# Altium PCB ECU_Freio_2024_Equipe_Imperador.PcbDoc
Units mm, origin at the board's own origin, x right, y up, seen from the top; angles counter-clockwise.
Board outline 61.21 x 68.83 mm, 2 copper layers (Top Layer, Bottom Layer); 18 components, 19 nets, 108 pads, 13 vias.
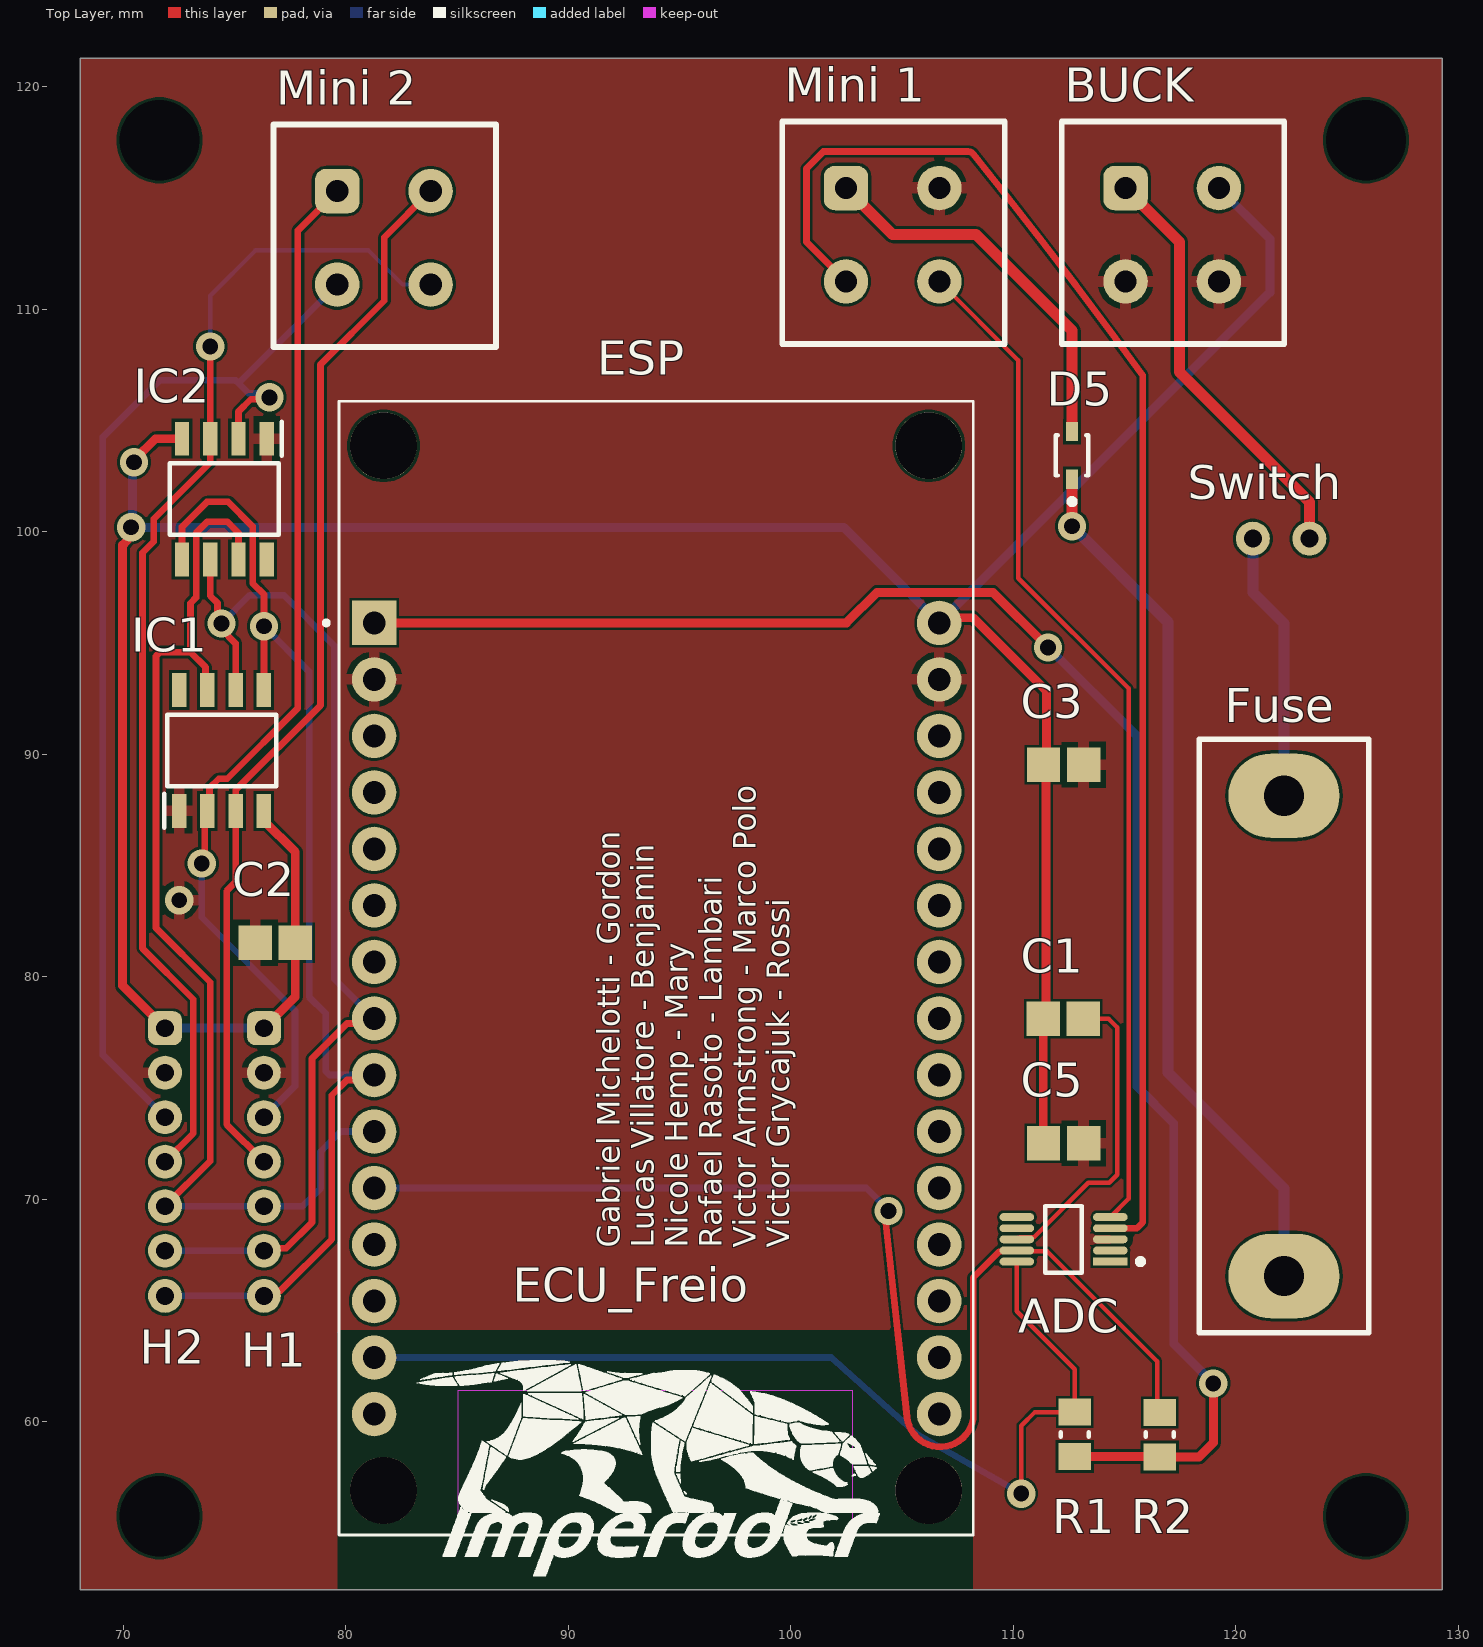
[diagram p0: Top Layer view]
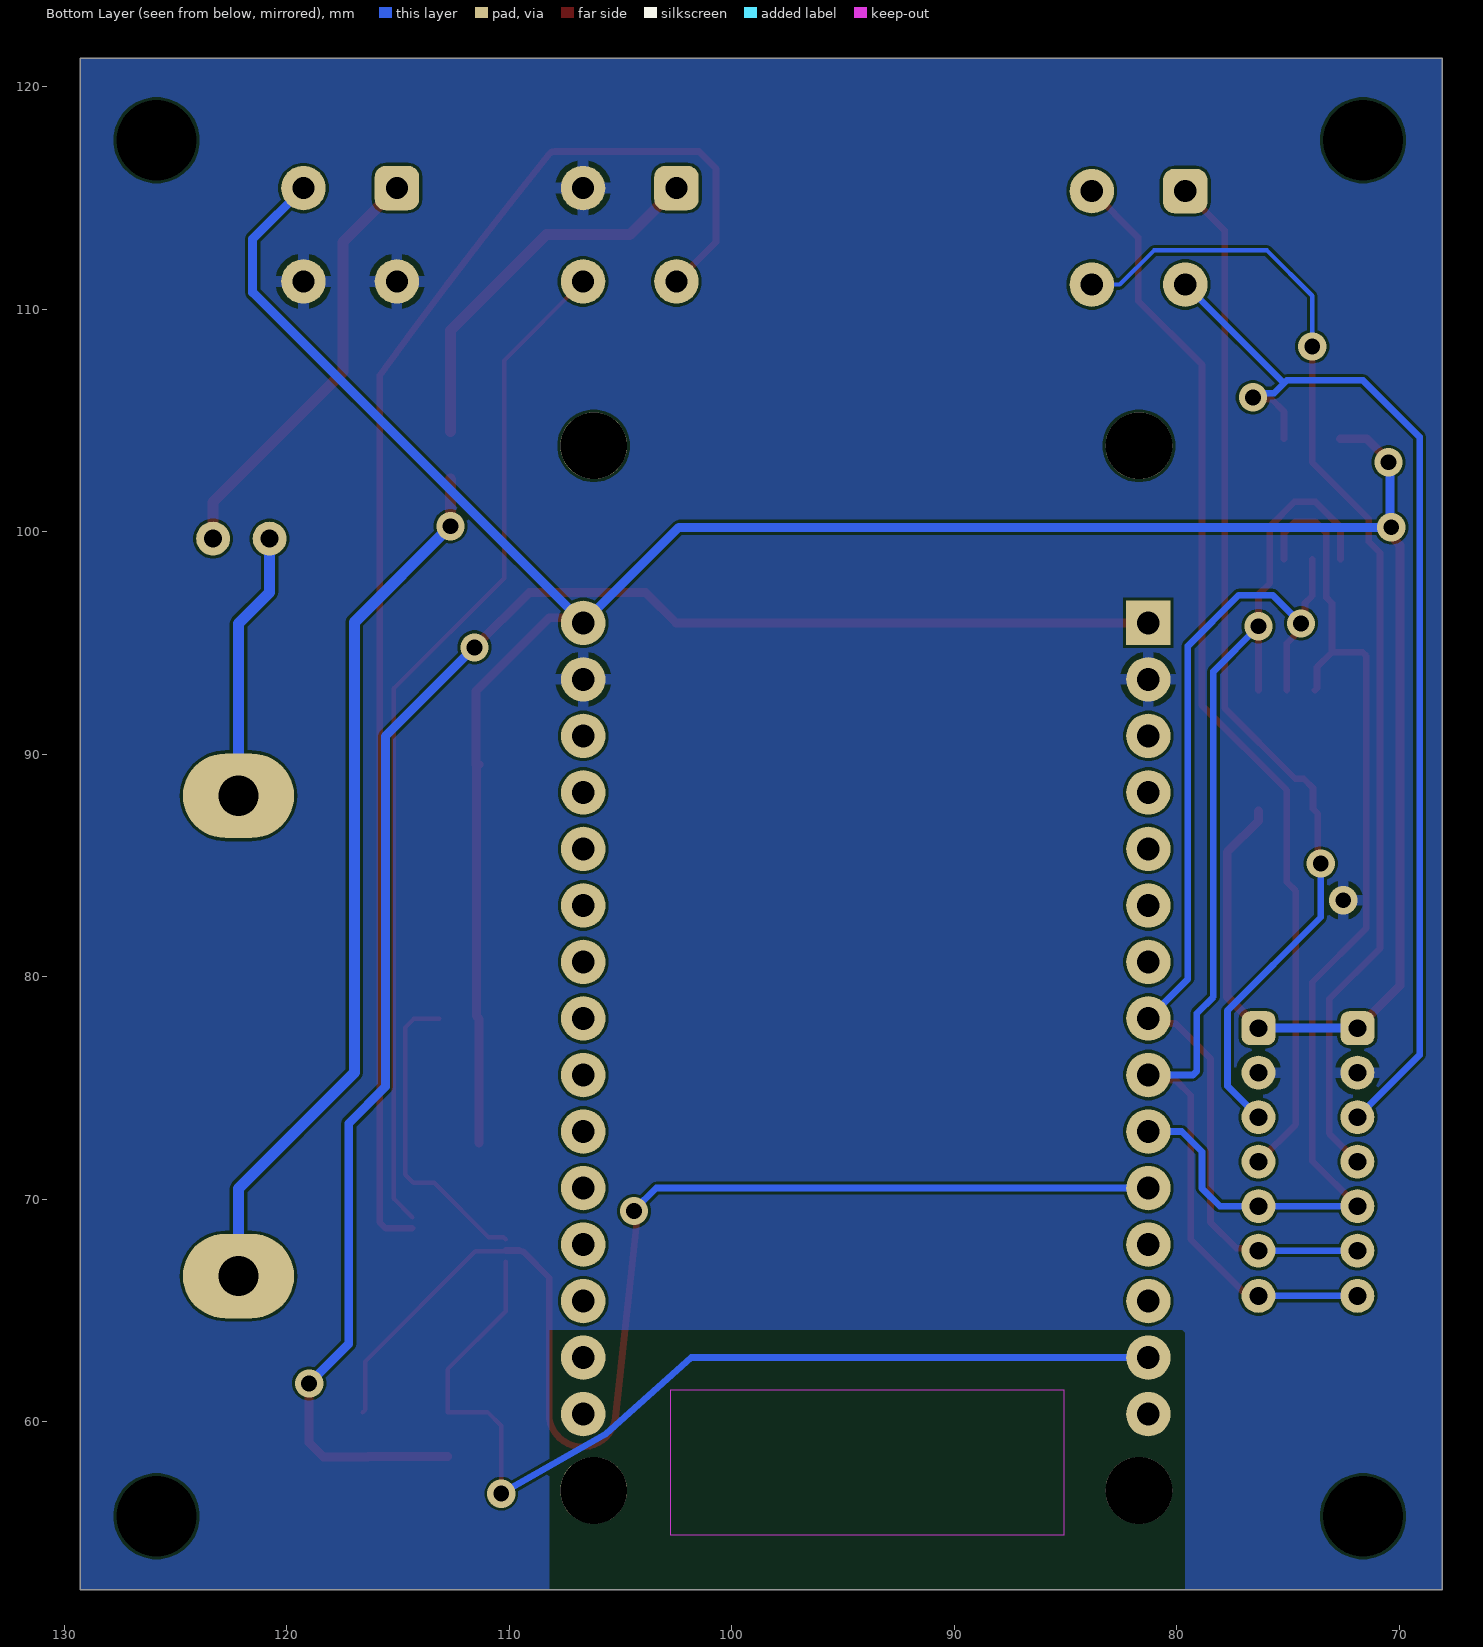
[diagram p1: Bottom Layer view, seen from below]

## Layer stack, top to bottom
Top Solder: solder mask 0.0102, Solder Resist, Dk 3.5
Top Layer: signal copper 0.0356
Dielectric 1: dielectric 0.32, FR-4, Dk 4.8
Bottom Layer: signal copper 0.0356
Bottom Solder: solder mask 0.0102, Solder Resist, Dk 3.5

## Board outline
68.072,52.451 129.286,52.451 129.286,121.285 68.072,121.285

## Design rules (kind name [scope] priority, off if disabled: settings)
Clearance Clearance_1 [All] p1: gap=0.125 ignorepadtopadclearanceinfootprint=FALSE
Clearance Clearance_1 [OnMid vs OnMid] p2: gap=0.125 ignorepadtopadclearanceinfootprint=FALSE sourcerule=46 cellrowname=All cellrowtype=0 cellcolname=All cellcoltype=0 innerlayers=TRUE
Clearance Clearance_2 [(ExistsOnLayer('Top Layer') Or ExistsOnLayer('Bottom Layer')) vs (ExistsOnLayer('Top Layer') Or ExistsOnLayer('Bottom Layer'))] p3: gap=0.125 ignorepadtopadclearanceinfootprint=FALSE sourcerule=46 cellrowname=All cellrowtype=0 cellcolname=All cellcoltype=0 outerlayers=TRUE
Clearance [All] p4: gap=0.125 ignorepadtopadclearanceinfootprint=FALSE ismatrix=TRUE
HoleSize [All] p1: absolutevalues=TRUE maxlimit=5 minlimit=0.025 maxpercent=80.000 minpercent=20.000
HoleToHoleClearance [All] p1: gap=0.125 allowstackedmicrovias=TRUE
MinimumSolderMaskSliver [All] p1: minsoldermaskwidth=0.05
PolygonConnect [All] p1: connectstyle=Relief reliefconductorwidth=0.5 reliefentries=4 polygonreliefangle="90 Angle" airgapwidth=0.254
RoutingVias [All] p1: holewidth=0.711 width=1.27 viastyle="Through Hole" minholewidth=0.711 minwidth=1.27 maxholewidth=0.711 maxwidth=1.27
SilkToSilkClearance [All] p1: silktosilkclearance=0.05
SilkToSolderMaskClearance [IsPad] p1: minsilkscreentomaskgap=0.05 clearancetoexposedcopper=TRUE
SolderMaskExpansion [All] p1: expansion=0.102 istentingtop=FALSE
SupplyNets "Schematic Supply Nets_3" [InNet('+3.3V')] p1: voltage=0.000
SupplyNets "Schematic Supply Nets_2" [InNet('+5')] p2: voltage=0.000
SupplyNets "Schematic Supply Nets_1" [InNet('+12')] p3: voltage=0.000
SupplyNets "Schematic Supply Nets" [InNet('GND')] p4: voltage=0.000
Width "Width_12V 2" [InNet('NetFuse_1')] p1: maxlimit=0.6 minlimit=0.5 preferedwidth=0.5
Width Width_GND [InNet('GND')] p2: maxlimit=0.5 minlimit=0.4 preferedwidth=0.5 minimp=50.000000 maximp=50.000000 favimp=50.000000
Width Width_3.3V [InNet('+3.3V')] p3: maxlimit=0.4 minlimit=0.4 preferedwidth=0.4 minimp=50.000000 maximp=50.000000 favimp=50.000000
Width Width_5V [InNet('+5')] p4: maxlimit=0.4 minlimit=0.4 preferedwidth=0.4 minimp=50.000000 maximp=50.000000 favimp=50.000000
Width Width_12V [InNet('+12')] p5: maxlimit=0.5 minlimit=0.5 preferedwidth=0.5 minimp=50.000000 maximp=50.000000 favimp=50.000000
Width [All] p6: maxlimit=0.5 minlimit=0.2 preferedwidth=0.3 minimp=50.000000 maximp=50.000000 favimp=50.000000
25 further rules are at their usual default settings.

## Classes and differential pairs
component class ECU_Freio_2024_Equipe_Imperador: ADC BUCK C2 C3 C5 D5 ESP Fuse H1 H2 IC1 IC2 "Mini 1" "Mini 2" R2 Switch

## Components (designator, comment, footprint, x,y, rotation, side; value= is the part's Value field where it differs from the comment)
ADC "ADS1115IDGSR" FP-DGS0010A-IPC_B 112.268,68.199 r180 top
BUCK "2 Pin Header Female" "CONECTOR MINIFIT 2X2" 115.053,115.452 r0 top
C1 "0.1uF" CAPC2013X145X50ML20T25 112.257,78.105 r0 top
C2 "0.1uF" CAPC2013X145X50ML20T25 76.835,81.534 r180 top
C3 "0.1uF" CAPC2013X145X50ML20T25 112.268,89.535 r0 top
C5 "0.1uF" CAPC2013X145X50ML20T25 112.268,72.517 r0 top
D5 "BAT54JFILM" FP-SOD323-MFG 112.649,103.432 r90 top value=7pF
ESP "ESP32-DEVKIT-V1" MODULE_ESP32_DEVKIT_V1 93.98,80.391 r0 top
Fuse "Fuse Holder 5x20mm" "Fuse Holder 5x20mm" 122.174,88.138 r0 top
H1 "CONECTOR JST XH 6 PIN_1" "7 Furos" 76.327,75.691 r0 top value="CONECTOR JST XH 6 PIN"
H2 "CONECTOR JST XH 6 PIN_1" "7 Furos" 71.882,75.691 r0 top value="CONECTOR JST XH 6 PIN"
IC1 "MAX6675ISA" SOIC127P600X175-8N 74.422,90.17 r90 top
IC2 "MAX6675ISA" SOIC127P600X175-8N 74.549,101.473 r270 top
"Mini 1" "2 Pin Header Female" "CONECTOR MINIFIT 2X2" 102.489,115.452 r0 top
"Mini 2" "2 Pin Header Female" "CONECTOR MINIFIT 2X2" 79.62,115.316 r0 top
R1 "10k" RESC2013X60X35ML10T20 112.776,59.436 r90 top
R2 "10k" RESC2013X60X35ML10T20 116.586,59.42 r90 top
Switch "2 Pin Header Female" "2 Pins Header Female - duplicate" 120.777,99.695 r90 top

## Footprints (in the part's own frame and the unit in brackets; to place one, negate y for a bottom-side part, rotate by r counter-clockwise, add the part's x,y. Pads: shape width x height; smd on the part's side, far side on the other; paste and mask are expansions set on the pad)
"2 Pins Header Female - duplicate" [mil]
  round 60 hole 31.5: 1(0,0) 2(0,-100)
"7 Furos" [mil]
  rrect50% 60x60 hole 31.5: 1(0,78.74)
  round 60 hole 31.5: 2(0,0) 3(0,-78.74) 4(0,-157.48) 5(0,-236.22) 6(0,-314.96) 7(0,-394.96)
CAPC2013X145X50ML20T25 [mm] "Chip Capacitor, 2-Leads, Body 2.00x1.25mm, IPC Low Density"
  rect 1.5x1.55 smd: 1(-0.9,0) 2(0.9,0)
  body extent -1.1,-0.72 1.1,0.72, height 1.45
"CONECTOR MINIFIT 2X2" [mm]
  rrect50% 2x2 hole 1: 1(0,0)
  round 2 hole 1: 2(4.2,0) 3(0,-4.2) 4(4.2,-4.2)
  silkscreen extent -2.86,-7.01 7.14,2.99
FP-DGS0010A-IPC_B [mm]
  rect 1.557x0.35 smd paste+0 mask+0: 1(-2.101,1)
  rrect100% 1.557x0.35 smd paste+0 mask+0: 2(-2.101,0.5) 3(-2.101,0) 4(-2.101,-0.5) 5(-2.101,-1) 6(2.101,-1) 7(2.101,-0.5) 8(2.101,0) 9(2.101,0.5) 10(2.101,1)
  silkscreen extent -3.58,-1.5 0.82,1.5
FP-SOD323-MFG [mm]
  rect 0.86x0.54 smd paste+0 mask+0: 1(-1.07,0) 2(1.07,0)
  silkscreen extent -2.2,-0.73 0.9,0.73, body extent -1.6,-0.82 1.6,0.82, height 0.25
"Fuse Holder 5x20mm" [mm]
  rrect100% 5x3.8 hole 1.8: 1(0,0) 2(0,-21.59)
  silkscreen extent -3.81,-24.13 3.81,2.54
MODULE_ESP32_DEVKIT_V1 [mm]
  rect 2x2 / inner round 2 / far side rect 2x2 hole 1.02: 1(-12.7,15.515)
  round 2 hole 1.02: 2(-12.7,12.975) 3(-12.7,10.435) 4(-12.7,7.895) 5(-12.7,5.355) 6(-12.7,2.815) 7(-12.7,0.275) 8(-12.7,-2.265) 9(-12.7,-4.805) 10(-12.7,-7.345) 11(-12.7,-9.885) 12(-12.7,-12.425) 13(-12.7,-14.965) 14(-12.7,-17.505) 15(-12.7,-20.045) 16(12.7,-20.045) 17(12.7,-17.505) 18(12.7,-14.965) 19(12.7,-12.425) 20(12.7,-9.885) 21(12.7,-7.345) 22(12.7,-4.805) 23(12.7,-2.265) 24(12.7,0.275) 25(12.7,2.815) 26(12.7,5.355) 27(12.7,7.895) 28(12.7,10.435) 29(12.7,12.975) 30(12.7,15.515)
  round 3 hole 3 unplated: ""(-12.28,-23.475) ""(-12.28,23.475) ""(12.23,-23.475) ""(12.23,23.475)
  Keep-Out Layer region: 8.78,-25.475 -8.91,-25.475 -8.91,-18.985 8.78,-18.985
  Keep-Out Layer region: 8.78,-25.475 -8.91,-25.475 -8.91,-18.985 8.78,-18.985
  silkscreen extent -14.95,-25.47 14.23,25.47
RESC2013X60X35ML10T20 [mm] "Chip Resistor, 2-Leads, Body 2.1x1.35mm, IPC Low Density"
  rect 1.2x1.45 smd: 1(-1,0) 2(1,0)
  silkscreen extent -0.1,-0.62 0.1,0.62, body extent -1.05,-0.68 1.05,0.67, height 0.6
SOIC127P600X175-8N [mm]
  rect 1.525x0.65 smd: 1(-2.712,1.905) 2(-2.712,0.635) 3(-2.712,-0.635) 4(-2.712,-1.905) 5(2.712,-1.905) 6(2.712,-0.635) 7(2.712,0.635) 8(2.712,1.905)
  silkscreen extent -3.47,-2.45 1.6,2.58, body extent -3,-2.45 3,2.45, height 1.75

## Part data
ADC: library part CMP-0003-00385-3, "IC ADC 16BIT SIGMA-DELTA 10VSSOP", Case/Package=VSSOP, Max Operating Temperature=125°C, Max Supply Voltage=5.5V, Min Operating Temperature=-40°C, Min Supply Voltage=2V, Package Quantity=2500, Power Dissipation=900uW, Contact Plating=Gold, Conversion Rate=0.86KS/s, Integral Nonlinearity (INL)=1LSB, Interface=I2C, Lead Free="Lead Free", Max Supply Voltage (DC)=5.5V, Min Supply Voltage (DC)=2V, Number of A/D Converters=1, Number of Bits=16, Number of Converters=1, Number of Inputs=4, Number of Pins=10, Packaging="Tape and Reel", Polarity=Bipolar, Radiation Hardening=No, REACH SVHC="No SVHC", Resolution=16b, RoHS Compliant=Yes, Sampling Rate=860S/s, Series=-, Supply Type=Single
C1 C2 C3 C5: library part CMP-1036-04819-2, Manufacturer=Kemet, Part Number=C0805C225K9PACTU
D5: library part CMP-2000-05927-2, "DIODE SCHOTTKY 40V 300MA SOD323", Capacitance=7pF, Forward Current=300mA, Manufacturer=STMicroelectronics, Max Junction Temp=+150°C, Max Repetitive Reverse Voltage=40V, Max Surge Forward Current=1.25A, Package=SOD323, Peak Reverse Current=1uA, Temperature="-40°C to +150°C", Temperature Range Low=-40°C, Automotive=No, Category=IC, ComponentLink2Description=Datasheet, ComponentLink2URL=https://www.st.com/resource/en/datasheet/bat54.pdf, Device Class L1="Discrete Semiconductors", Device Class L2=Diodes, Device Class L3="Schottky Diodes", Digikey Description="DIODE SCHOTTKY 40V 300MA SOD323", Height=1.17mm, Ipc Land Pattern Name=SOD250128X117-2, Lead Free=Yes, Manufacturer Part Number=BAT54JFILM, Mouser Description="Schottky Diodes & Rectifiers 300mA 40 Volt", Octopart=https://octopart.com/bat54jfilm-stmicroelectronics-326073, RoHS=TRUE, Standoff Height=0mm, Temperature Range High=+150°C
ESP: "Dual core, Wi-Fi: 2.4 GHz up to 150 Mbits/s,BLE (Bluetooth Low Energy) and legacy Bluetooth, 32 bits, Up to 240 MHz", Package=None, Availability="Not in stock", Check_prices=https://www.snapeda.com/parts/ESP32-DEVKIT-V1/Do+it/view-part/?ref=eda, MF="Do it", MP=ESP32-DEVKIT-V1, Price=None, SnapEDA_Link=https://www.snapeda.com/parts/ESP32-DEVKIT-V1/Do+it/view-part/?ref=snap
IC1 IC2: "Integrated Circuit", Manufacturer_Name="Analog Devices", Mouser Part Number=N/A, Datasheet Link=http://datasheets.maximintegrated.com/en/ds/MAX6675.pdf, Height=1.75mm, Manufacturer_Part_Number=MAX6675ISA, Mouser Price/Stock=https://www.mouser.com/Search/Refine.aspx?Keyword=N%2FA
R1 R2: library part CMP-2100-03671-1, "Chip Resistor, 1 KOhm, +/- 1%, 125 mW, -55 to 155 degC, 0805 (2012 Metric), RoHS, Tape and Reel", Case Code (Imperial)=0805, Case Code (Metric)=2012, Manufacturer=Yageo, Max Operating Temperature=155degC, Max Power Dissipation=125mW, Min Operating Temperature=-55degC, Package Description="2-Pin Surface Mounted Device, Body 2 x 1.25 mm", Package Quantity=1, Resistance=1KOhm, Temperature Coefficient=100ppm/degreesC, Tolerance=1%, Voltage Rating=150V, Case/Package=0805, Composition=ThickFilm, Datasheet URL=http://www.yageo.com/NewPortal/yageodocoutput?fileName=/pdf/R-Chip/PYu-RC_Group_51_RoHS_L_5.pdf, Datasheet Version="Rev. 5, 10/2016", Depth=1.25mm, Height=0.024inch, Lead Free=LeadFree, Length=0.079inch, Manufacturer URL=http://www.yageo.com/, Military Standard=Not, Number of Pins=2, Number of Terminations=2, Package Reference=0805, Packaging=TapeandReel, Power Rating=125mW, REACH SVHC=Unknown, RoHSCompliant=true, Termination=SMD/SMT, Voltage Rating (DC)=150V, Width=0.049inch

## Free pads (board coordinates)
  round 1.524 hole 3.6: 24(71.628,55.753) 24(71.628,117.602) 24(125.857,55.753) 24(125.857,117.602)

## Via types
v1: diameter 1.27, hole 0.711, Top Layer to Bottom Layer, 13 vias

## Nets (pads, with @x,y where several pads share a name; then routed paths per layer and width w, separated by ;. In a path a pad name is that pad's centre, name@x,y a point inside that pad or via, vN(x,y) a via of type N, cw(c..) or ccw(c..) an arc to the next point about the centre after c; other vN are vias at no path point)
+3.3V: ESP.1 R1.1 R2.1 | length 77.4
  Top Layer w0.4: ESP.1 102.51,95.906 103.886,97.282 109.093,97.282 v1(111.569,94.805) ; R1.1 116.348,58.436 116.364,58.42 R2.1 118.364,58.42 118.999,59.055 v1(118.999,61.722)
  Bottom Layer w0.4: v1(111.569,94.805) 115.57,90.805 115.57,75.057 117.221,73.406 117.221,63.5 v1(118.999,61.722) v1@119.126,61.595
+5: BUCK.2 C1.1 C2.1 C3.1 C5.1 ESP.30 H1.1 H2.1 IC1.4 IC2.4 | length 135.9
  Top Layer w0.4: v1(70.358,100.203) 70.192,100.037 70.192,99.621 69.977,99.407 69.977,79.596 H2.1 ; v1(70.485,103.124) 70.485,103.217 71.453,104.185 IC2.4 ; H1.1 77.735,79.099 C2.1 77.735,85.612 76.327,87.02 IC1.4 ; ESP.30 106.913,96.139 108.204,96.139 111.495,92.848 C3.1@111.495,89.535 ; C5.1@111.357,72.528 C1.1@111.357,78.083 ; C1.1 111.484,78.232 111.484,89.419 C3.1
  Bottom Layer w0.4: v1(70.485,103.124) 70.421,103.06 70.421,100.266 v1(70.358,100.203) 102.383,100.203 ESP.30 121.539,110.765 121.539,113.166 BUCK.2 ; H2.1 H1.1
+12: "Mini 1.1" D5.2 | length 17.4
  Top Layer w0.5: 102.489,115.452 104.581,113.36 108.338,113.36 112.649,109.049 D5.2
GND: "Mini 1.2" ADC.3 BUCK.3 BUCK.4 C2.2 C3.2 C5.2 ESP.2 ESP.29 H1.2 H2.2 IC1.1 IC2.1
  other v1: 72.517,83.439
NetADC_4: "Mini 1.3" ADC.4 | length 65.8
  Top Layer w0.3: 102.489,111.252 100.711,113.03 100.711,116.332 101.473,117.094 107.975,117.094 cw(c107.975,116.794) 108.208,116.982 cw(c-93.94,-45.614) 115.824,107.031 115.824,68.961 115.562,68.699 ADC.4
NetADC_5: "Mini 1.4" ADC.5 | length 45.9
  Top Layer w0.2: 106.689,111.252 110.236,107.705 110.236,97.917 115.189,92.964 115.189,70.019 ADC.5
NetADC_8: ADC.8 C1.2 | length 14
  Top Layer w0.2: ADC.8 110.267,68.299 110.936,68.299 113.376,70.739 114.32,70.739 114.681,71.1 114.681,77.724 114.3,78.105 C1.2
NetADC_9: ADC.9 ESP.11 R2.2 | length 56.8
  Top Layer w0.2: ADC.9 110.196,67.67 111.527,67.67 116.47,62.727 116.47,60.536 R2.2
  Top Layer w0.3: v1(104.394,69.469) 104.246,69.285 104.246,69.163 105.231,60.21 ccw(c106.722,60.375) 108.204,60.135 108.204,66.475 109.378,67.649 ADC.9@109.563,67.699 ; ADC.9@109.564,67.699 ADC.9
  Bottom Layer w0.3: ESP.11 103.399,70.506 104.394,69.511 v1(104.394,69.469)
NetADC_10: ADC.10 ESP.14 R1.2 | length 44.7
  Top Layer w0.2: ADC.10 110.167,64.966 112.776,62.357 R1.2 110.982,60.436 110.363,59.817 v1(110.363,56.769)
  Bottom Layer w0.3: ESP.14 101.822,62.886 105.67,59.455 105.697,59.439 v1(110.363,56.769)
NetBUCK_1: BUCK.1 Switch.2 | length 19.2
  Top Layer w0.5: BUCK.1 117.475,113.03 117.475,107.188 123.317,101.346 Switch.2
NetD5_1: D5.1 Fuse.2 | length 39.8
  Top Layer w0.5: v1(112.649,100.254) D5.1
  Bottom Layer w0.5: v1(112.649,100.254) 116.967,95.936 116.967,75.692 122.174,70.485 Fuse.2
NetESP_8: ESP.8 H1.6 H2.6 IC1.6 IC2.6 | length 48.4
  Top Layer w0.3: IC2.6 73.914,97.12 74.236,96.798 74.236,96.071 v1(74.422,95.885) 74.422,95.623 75.057,94.988 IC1.6 ; H1.6 76.44,67.804 77.329,67.804 78.486,68.961 78.486,76.327 80.057,77.898 81.052,77.898 ESP.8
  Bottom Layer w0.3: H2.6 H1.6 ; v1(74.422,95.885) 75.692,97.155 77.216,97.155 79.502,94.869 79.502,79.904 ESP.8
NetESP_9: ESP.9 H1.7 H2.7 IC1.5 IC2.5 | length 53.8
  Top Layer w0.3: IC2.5 72.644,100.222 73.768,101.346 74.72,101.346 75.819,100.247 75.819,97.688 76.327,97.18 v1(76.327,95.758) IC1.5 ; H1.7 76.561,65.893 77.069,65.893 79.375,68.199 79.375,74.676 80.057,75.358 81.052,75.358 ESP.9
  Bottom Layer w0.3: H2.7 H1.7 ; v1(76.327,95.758) 78.359,93.726 78.359,79.1 79.1,78.359 79.1,75.762 79.276,75.586 ESP.9
NetESP_10: ESP.10 H1.5 H2.5 IC1.7 IC2.7 | length 50.9
  Top Layer w0.3: H2.5 73.914,71.723 73.914,79.756 71.479,82.191 71.479,94.414 71.655,94.59 73.025,94.59 ; IC1.7 73.698,92.971 73.698,93.917 73.025,94.59 ; IC2.7 75.184,99.949 74.676,100.457 73.787,100.457 73.279,99.949 73.279,97.041 73.025,96.787 73.025,94.59
  Bottom Layer w0.3: H2.5 H1.5 78.073,69.691 78.867,70.485 78.867,72.136 79.777,73.046 ESP.10
NetFuse_1: Fuse.1 Switch.1 | length 12.1
  Bottom Layer w0.5: Switch.1 120.777,97.282 122.174,95.885 Fuse.1
NetH1_3: "Mini 2.1" H1.3 IC1.2 | length 46.7
  Top Layer w0.3: v1(73.533,85.09) 73.66,85.217 73.66,87.331 73.882,87.553 73.882,88.487 74.295,88.9 74.676,88.9 77.851,92.075 77.851,113.547 79.62,115.316
  Bottom Layer w0.3: v1(73.533,85.09) 73.533,82.677 77.724,78.486 77.724,75.088 H1.3
NetH1_4: "Mini 2.2" H1.4 IC1.3 | length 48.1
  Top Layer w0.3: H1.4 74.651,73.367 74.651,83.853 75.057,84.259 IC1.3 75.057,88.392 78.867,92.202 78.867,107.518 81.737,110.388 81.737,113.233 83.82,115.316
NetH2_3: "Mini 2.3" H2.3 IC2.2 | length 49.8
  Top Layer w0.3: IC2.2 75.184,105.41 75.733,105.959 76.495,105.959 v1(76.581,106.045)
  Bottom Layer w0.3: H2.3 69.088,76.485 69.088,104.267 71.628,106.807 75.057,106.807 75.184,106.68 ; v1(76.581,106.045) 76.395,106.231 75.633,106.231 75.184,106.68 ; 79.62,111.116 75.184,106.68
NetH2_4: "Mini 2.4" H2.4 IC2.3 | length 53
  Top Layer w0.3: H2.4 73.152,72.961 73.152,78.994 70.866,81.28 70.866,99.06 71.374,99.568 71.374,100.584 73.914,103.124 v1(73.914,108.331)
  Bottom Layer w0.2: v1(73.914,108.331) 73.914,110.617 75.946,112.649 81.026,112.649 82.559,111.116 83.82,111.116
pads on no net: ADC.1 ADC.2 ADC.6 ADC.7 ESP. ESP.3 ESP.4 ESP.5 ESP.6 ESP.7 ESP.12 ESP.13 ESP.15 ESP.16 ESP.17 ESP.18 ESP.19 ESP.20 ESP.21 ESP.22 ESP.23 ESP.24 ESP.25 ESP.26 ESP.27 ESP.28 IC1.8 IC2.8

## Polygon pours and split planes (outlines as drawn)
GND on Bottom Layer "GND_L02_P001" (solid, pour order 1): 68.072,52.451 129.286,52.451 129.286,121.285 68.072,121.285
GND on Top Layer "GND_L01_P000" (solid, pour order 0): 68.072,52.451 129.286,52.451 129.286,121.285 68.072,121.285

## Other copper
Top Layer:
  pour cut-out: 79.629,64.008 79.756,64.135 108.204,64.135 108.204,52.451 79.629,52.451
Bottom Layer:
  pour cut-out: 79.629,64.008 79.756,64.135 108.204,64.135 108.204,52.451 79.629,52.451

## Silkscreen, mask and mechanical layers (free items; w line width, h text height)
Top Overlay:
  drawing of 50 lines, arcs and shapes, not listed
  text "Gabriel Michelotti - Gordon / Lucas Villatore - Benjamin / Nicole Hemp - Mary / Rafael Rasoto - Lambari / Victor Armstrong - Marco Polo / Victor Grycajuk - Rossi" at 99.949,67.818 h1.02 r90
  text "ECU_Freio" at 87.503,65.405 h1.52